# EAGLE board lp-servo12 (EAGLE 6.3)
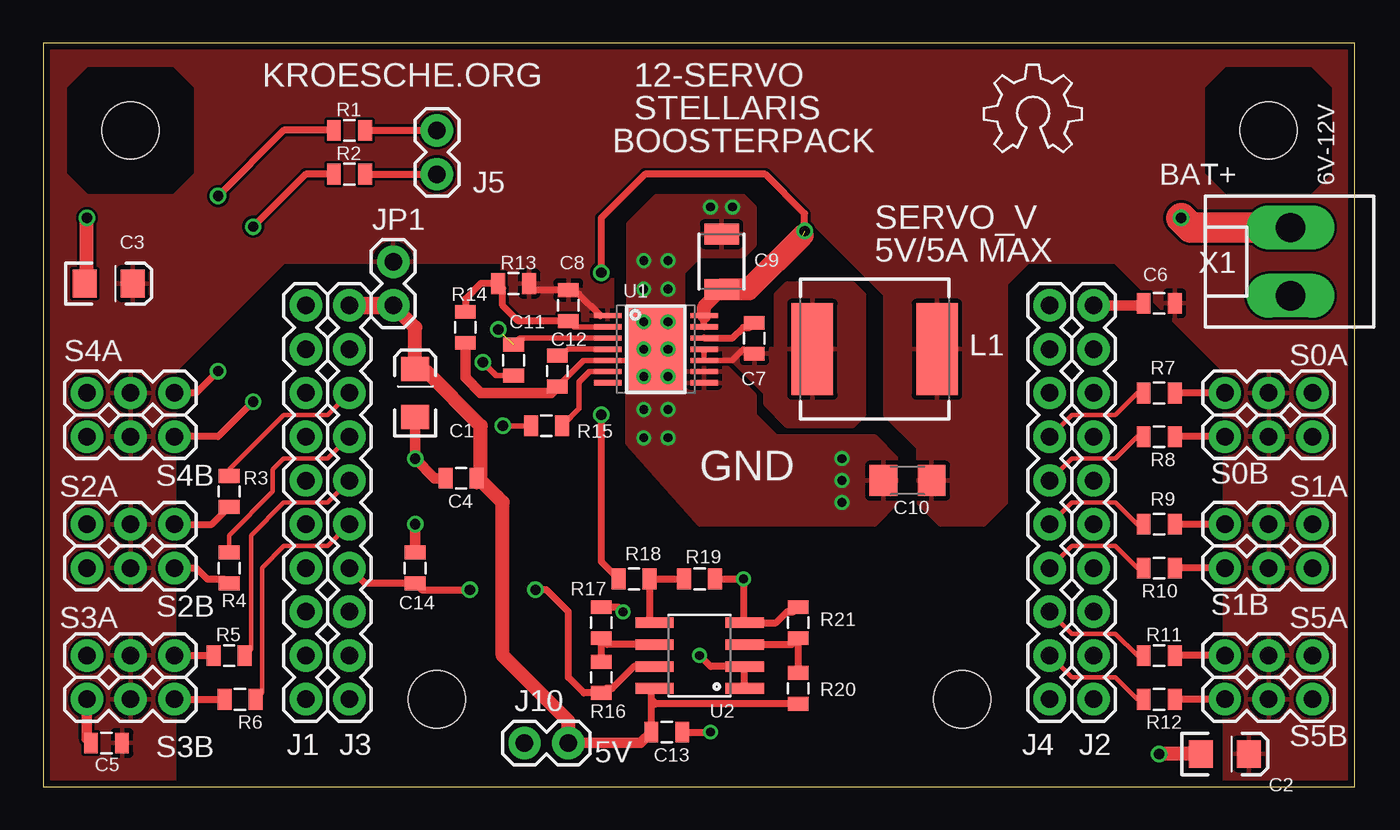
[diagram p0: board, top side]
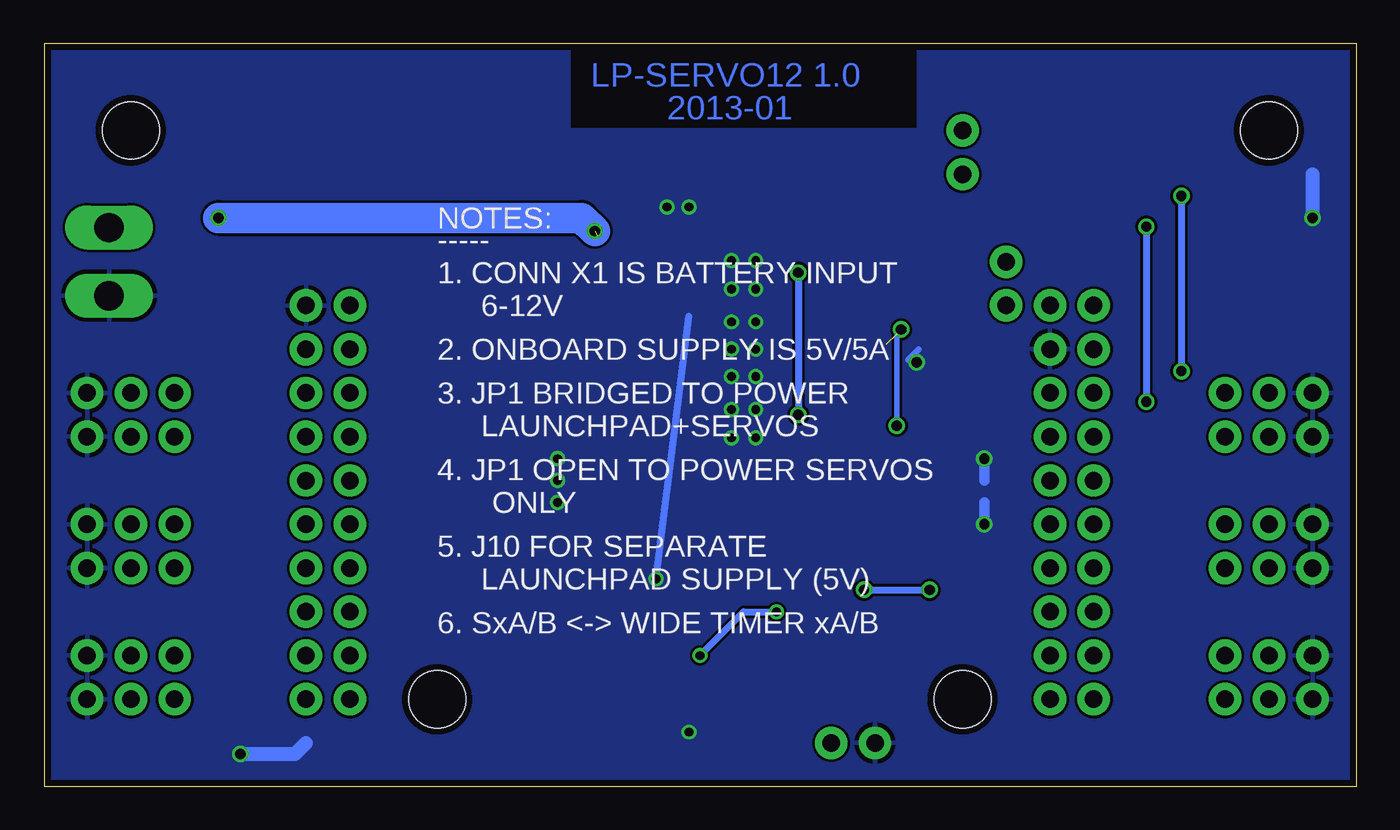
[diagram p1: board, bottom side, seen from below]

Size 76.12 x 43.17 mm. Coordinates in mm from the lower left corner, seen from the top.
Outline: 0,0 76.12,0 76.12,43.17 0,43.17 0,0
Copper layers (1*16): Top 0.0356mm / dielectric 1.5011mm / Bottom 0.0356mm
Design rules "LaenPCBOrder *": minimum track width 6mil, minimum drill 13mil, track to track 6mil, track to pad 6mil, pad to pad 6mil, via to via 6mil, smd to smd 6mil, copper to edge 15mil, drill to drill 6mil, minimum pad ring 7mil, minimum via ring 7mil, stop-mask expansion 4mil, vias tented up to drill 24mil, thermal gap 10mil

## Footprints (pad centres in the part's own frame; a part is rotated, then mirrored left to right if it is on the bottom)
EIA3216 = smd 1.4 x 1.6: A 1.4,0; C -1.4,0
0805 = smd 0.8 x 1.2: 1 -0.9,0; 2 0.9,0
1210 = smd 1.2 x 2: 1 -1.6,0; 2 1.6,0
1206 = smd 1.6 x 1.8: 1 -1.4,0; 2 1.4,0
1X10 = drill 1.016 pad 1.88: 1 0,0; 2 2.54,0; 3 5.08,0; 4 7.62,0; 5 10.16,0; 6 12.7,0; 7 15.24,0; 8 17.78,0; 9 20.32,0; 10 22.86,0
1X02 = drill 1.016 pad 1.88: 1 0,0; 2 2.54,0
VISHAY-IHLP3232DZER = smd 2.413 x 5.334: 1 -3.619,0; 2 3.619,0
1X03 = drill 1.016 pad 1.88: 1 0,0; 2 2.54,0; 3 5.08,0
STAND-OFF = hole 3.302: 0,0
PWP-R-PDSO-G14 = smd 0.3 x 1.6: 1 -1.95,-2.8; 2 -1.3,-2.8; 3 -0.65,-2.8; 4 0,-2.8; 5 0.65,-2.8; 6 1.3,-2.8; 7 1.95,-2.8; 8 1.95,2.8; 9 1.3,2.8; 10 0.65,2.8; 11 0,2.8; 12 -0.65,2.8; 13 -1.3,2.8; 14 -1.95,2.8 | smd 5 x 3.4: 15 0,0
SO08 = smd 0.61 x 2.21: 1 -1.905,-2.616; 2 -0.635,-2.616; 3 0.635,-2.616; 4 1.905,-2.616; 5 1.905,2.616; 6 0.635,2.616; 7 -0.635,2.616; 8 -1.905,2.616
KK-156-2 = drill 1.7 pad 2.184 long: 1 -1.98,0; 2 1.98,0

## Placement (x,y rotation side)
C1  10uF  [EIA3216]  21.59,22.86 90 top
C2  10uF  [EIA3216]  68.58,1.91 0 top
C3  10uF  [EIA3216]  3.81,29.21 0 top
C4  1uF  [0805]  24.26,17.91 180 top
C5  1uF  [0805]  3.68,2.54 180 top
C6  1uF  [0805]  64.77,28.07 180 top
C7  100nF  [0805]  41.27,26.04 270 top
C8  22pF  [0805]  30.48,27.94 270 top
C9  22uF  [1210]  39.37,30.48 90 top
C10  22uF  [1206]  50.16,17.78 180 top
C11  1uF  [0805]  27.3,24.77 270 top
C12  10nF  [0805]  29.84,24.13 270 top
C13  1uF  [0805]  36.2,3.17 0 top
C14  1uF  [0805]  21.59,12.7 90 top
J1  [1X10]  15.24,27.94 270 top
J2  [1X10]  60.96,27.94 270 top
J3  [1X10]  17.78,27.94 270 top
J4  [1X10]  58.42,27.94 270 top
J5  [1X02]  22.86,38.1 270 top
J10  [1X02]  27.94,2.54 0 top
JP1  [1X02]  20.32,30.48 270 top
L1  3.3uH  [VISHAY-IHLP3232DZER]  48.26,25.4 180 top
LOGO2  OSHW_LOGO_6MILX0200-NT  [OSHW_6X200_NOTEXT]  54.61,36.83 0 top
R1  220  [0805]  17.78,38.1 0 top
R2  220  [0805]  17.78,35.56 0 top
R3  220  [0805]  10.79,17.14 90 top
R4  220  [0805]  10.79,12.7 90 top
R5  220  [0805]  10.79,7.62 0 top
R6  220  [0805]  11.43,5.08 0 top
R7  220  [0805]  64.77,22.86 0 top
R8  220  [0805]  64.77,20.32 0 top
R9  220  [0805]  64.77,15.24 0 top
R10  220  [0805]  64.77,12.7 0 top
R11  220  [0805]  64.77,7.62 0 top
R12  220  [0805]  64.77,5.08 0 top
R13  124K  [0805]  27.3,29.21 0 top
R14  22.1K  [0805]  24.51,26.67 90 top
R15  100K  [0805]  29.21,20.95 0 top
R16  30K  [0805]  32.38,6.35 270 top
R17  10K  [0805]  32.38,9.53 270 top
R18  30K  [0805]  34.29,12.06 0 top
R19  10K  [0805]  38.1,12.06 180 top
R20  15K  [0805]  43.81,5.71 270 top
R21  10K  [0805]  43.81,9.53 270 top
S0A  [1X03]  68.58,22.86 0 top
S0B  [1X03]  68.58,20.32 0 top
S1A  [1X03]  68.58,15.24 0 top
S1B  [1X03]  68.58,12.7 0 top
S2A  [1X03]  2.54,15.24 0 top
S2B  [1X03]  2.54,12.7 0 top
S3A  [1X03]  2.54,7.62 0 top
S3B  [1X03]  2.54,5.08 0 top
S4A  [1X03]  2.54,22.86 0 top
S4B  [1X03]  2.54,20.32 0 top
S5A  [1X03]  68.58,7.62 0 top
S5B  [1X03]  68.58,5.08 0 top
STANDOFF1  STAND-OFF  [STAND-OFF]  53.34,5.08 0 top
STANDOFF2  STAND-OFF  [STAND-OFF]  22.86,5.08 0 top
STANDOFF3  STAND-OFF  [STAND-OFF]  5.08,38.1 0 top
STANDOFF4  STAND-OFF  [STAND-OFF]  71.12,38.1 0 top
U1  TPS54526PWP  [PWP-R-PDSO-G14]  35.56,25.4 270 top
U2  LMV358  [SO08]  38.1,7.62 90 top
X1  [KK-156-2]  72.39,30.48 90 top

## Library data of the parts
C1-C3 = SparkFun-Passives; PARTNO: CAP_10u_20V_20PCT_1206; SIZE: (1206); TOL: 20%; TYPE: TANT; VOLT: 20V
C4-C6 C11 C13 C14 = SparkFun-Passives; PARTNO: CAP_1u_20V_20PCT_0805; SIZE: (0805); TOL: 20%; VOLT: 20V
C7 = SparkFun-Passives; PARTNO: CAP_100n_25V_10PCT_0805; SIZE: (0805); TC: X7R; TOL: 10%; VOLT: 25V
C8 = SparkFun-Passives; PARTNO: CAP_22p_50V_10PCT_0805; SIZE: (0805); TC: C0G; TOL: 10%; VOLT: 50V
C9 = SparkFun-Passives; PARTNO: CAP_22u_16V_10PCT_1210; SIZE: (1210); TC: X5R; TOL: 10%; VOLT: 16V
C10 = SparkFun-Passives; PARTNO: CAP_22u_16V_20PCT_1206; SIZE: (1206); TC: X5R; TOL: 20%; VOLT: 16V
C12 = SparkFun-Passives; PARTNO: CAP_10n_50V_10PCT_0805; SIZE: (0805); TC: X7R; TOL: 10%; VOLT: 50V
J1-J4 = SparkFun-Connectors; PARTNO: 68002-110HLF
J5 JP1 = SparkFun-Passives; PARTNO: 68002-202HLF
J10 = SparkFun-Passives; PARTNO: 68016-402
L1 = kroesche; LOAD: 10A; MANF: Vishay/Dale; MANF#: IHLP3232DZER3R3M11; MOUSER#: 70-IHLP3232DZER3R3M11; PARTNO: IHLP3232DZER3R3M11; TOL: 20%
LOGO2 = ohw-logo; BOM: EXCLUDE
R1 = SparkFun-Resistors; MANF: Panasonic; MANF#: ERJ-6GEYJ221V; MOUSER#: 667-ERJ-6GEYJ221V; PARTNO: RES_220_20V_10PCT_0805; SIZE: (0805); TOL: 10%; VOLT: 50V
R2-R12 = SparkFun-Resistors; PARTNO: RES_220_20V_10PCT_0805; SIZE: (0805); TOL: 10%; VOLT: 50V
R13 = SparkFun-Resistors; PARTNO: RES_124K_20V_1PCT_0805; RATE: 1/8W; SIZE: (0805); TOL: 1%; VOLT: 20V
R14 = SparkFun-Resistors; PARTNO: RES_22.1K_20V_1PCT_0805; RATE: 1/8W; SIZE: (0805); TOL: 1%; VOLT: 20V
R15 = SparkFun-Resistors; PARTNO: RES_100K_20V_1PCT_0805; RATE: 1/8W; SIZE: (0805); TOL: 1%; VOLT: 20V
R16 R18 = SparkFun-Resistors; PARTNO: RES_30K_20V_1PCT_0805; SIZE: (0805); TOL: 1%; VOLT: 20V
R17 R19 R21 = SparkFun-Resistors; PARTNO: RES_10K_20V_1PCT_0805; SIZE: (0805); TOL: 1%; VOLT: 20V
R20 = SparkFun-Resistors; PARTNO: RES_15K_20V_1PCT_0805; SIZE: (0805); TOL: 1%; VOLT: 20V
S0A S0B S1A S1B S2A S2B S3A S3B S4A S4B S5A S5B = SparkFun-Passives; PARTNO: 68002-403HLF
STANDOFF1-STANDOFF4 = SparkFun-Electromechanical; BOM: EXCLUDE
U1 = kroesche; MANF: Texas Instruments; MANF#: TPS54526PWP; MOUSER#: 595-TPS54526PWP; PARTNO: TPS54526PWP
U2 = SparkFun-AnalogIC; MANF: Texas Instruments; MANF#: LMV358QDR; MOUSER#: 595-LMV358QDR; PARTNO: LMV358QDR
X1 = con-molex; MANF: Molex; MANF#: 76650-0208; MOUSER#: 538-76650-0208; OC_FARNELL: unknown; OC_NEWARK: unknown; PARTNO: KK-156-2-LOCK-RTANGLE

## Nets
+3V3: J1.1
+5V: C1.A C4.1 C13.1 J3.1 J10.2 JP1.2 R20.2 U2.8
AIN2: C14.1 J3.7 R16.2 U2.7
GND: C1.C C2.C C3.C C4.2 C5.2 C6.2 C9.2 C10.2 C11.2 C12.2 C13.2 C14.2 J2.1 J3.2 J10.1 R14.1 R19.1 R21.1 S0A.3 S0B.3 S1A.3 S1B.3 S2A.1 S2B.1 S3A.1 S3B.1 S4A.1 S4B.1 S5A.3 S5B.3 U1.5 U1.8 U1.9 U1.15 U2.4 X1.1
N$1: R1.1 S4A.3
N$2: C7.1 U1.12
N$3: R2.1 S4B.3
N$4: R3.1 S2A.3
N$5: R4.1 S2B.3
N$6: R5.1 S3A.3
N$7: C7.2 L1.2 U1.10 U1.11
N$8: R16.1 R17.2 U2.6
N$9: R7.2 S0A.1
N$10: R6.1 S3B.3
N$11: R8.2 S0B.1
N$12: R9.2 S1A.1
N$13: R10.2 S1B.1
N$14: R11.2 S5A.1
N$15: R12.2 S5B.1
N$16: C8.2 R13.1 R14.2 U1.2
N$17: R18.2 R19.2 U2.5
N$18: R15.2 U1.6
N$20: C12.1 U1.4
N$21: R17.1 U2.1 U2.2
N$22: C11.1 R15.1 U1.3
N$23: R20.1 R21.2 U2.3
SERVO_V: C2.A C3.A C5.1 C6.1 C8.1 C10.1 JP1.1 L1.1 R13.2 S0A.2 S0B.2 S1A.2 S1B.2 S2A.2 S2B.2 S3A.2 S3B.2 S4A.2 S4B.2 S5A.2 S5B.2 U1.1
VBAT: C9.1 R18.1 U1.13 U1.14 X1.2
WT0A: J4.4 R7.1
WT0B: J4.5 R8.1
WT1A: J4.6 R9.1
WT1B: J4.7 R10.1
WT2A: J3.3 R3.2
WT2B: J3.4 R4.2
WT3A: J3.5 R5.2
WT3B: J3.6 R6.2
WT4A: J5.1 R1.2
WT4B: J5.2 R2.2
WT5A: J4.8 R11.1
WT5B: J4.9 R12.1

## Tracks (layer width: path | path; a pad name or v marks a point on that pad's centre or on a via)
+5V
  Top 0.254: 25.16,17.39 C4.1 26.24,16.83 26.35,16.83
  Top 0.406: C13.1 35.3,5.08 | 35.3,5.08 35.3,5.53 U2.8 | R20.2 35.56,4.82 35.3,5.08 | 22.23,24.13 21.72,24.13 C1.A
  Top 0.61: C4.1 25.4,18.15 | C13.1 34.66,2.54 J10.2
  Top 0.813: C1.A 21.59,26.67 JP1.2 | 22.23,24.13 25.4,20.95 25.4,17.78 26.35,16.83 26.67,16.51 26.67,7.62 30.48,3.81 J10.2
  Top 1.016: JP1.2 J3.1
AIN2  (via drill 0.6)
  Top 0.406: U2.7 34.29,6.99 33.02,5.71 32.65,5.71 R16.2 31.38,5.45 30.48,6.35 30.48,10.16 29.21,11.43 v28.57,11.43 | J3.7 18.68,11.8 C14.1 21.96,11.43 v24.77,11.43
  Bottom 0.406: v28.57,11.43 v24.77,11.43
GND  (via drill 0.51, 0.6)
  Top 0.305: C11.2 26.3,23.86 v25.53,24.64 | C12.2 31.36,24.75 U1.5 34.91,24.75 U1.15
  Top 0.406: R21.1 43.55,10.16 43.18,10.16 42.55,9.53 U2.4 40.64,9.6 v40.64,12.06 R19.1 | C13.2 v38.73,3.17
  Top 0.61: R14.1 24.51,23.75 25.4,22.86 29.48,22.86 C12.2 | C5.2 2.54,2.78 S3B.1 | C1.C v21.59,19.05 22.73,17.91 C4.2 | C14.2 v21.59,15.24 | C6.2 63.74,27.94 J2.1
  Top 0.813: C3.C 2.54,29.21 v2.54,33.02 | C2.C v64.77,1.91
  Bottom 0.305: v25.53,24.64 26.04,24.77 25.4,25.4
  Bottom 0.406: v40.64,12.06 38.73,27.3
  Bottom 0.61: v21.59,19.05 21.59,17.78 | v21.59,15.24 21.59,16.51
  Bottom 0.813: v2.54,33.02 2.54,35.56 | v64.77,1.91 61.59,1.91 60.96,2.54
  other vias: 34.86,30.54 38.73,33.66 40.01,33.66 36.26,30.54 36.26,28.89 34.86,28.89 34.86,26.99 36.26,26.99 34.86,25.4 36.26,25.4 34.86,23.81 36.26,23.81 34.86,21.91 36.26,21.91 34.86,20.26 36.26,20.26 46.35,19.05 46.35,17.78 46.35,16.51
  pour Bottom: 0,43.18 25.4,43.18 25.4,38.1 45.72,38.1 45.72,43.18 76.2,43.18 76.2,0 0,0
  pour Top: 33.97,25.4 33.97,32.7 35.56,34.29 40.64,34.29 41.27,33.66 41.27,31.43 40.64,30.8 38.1,30.8 37.15,29.84 37.15,25.4
  pour Top: 33.97,25.4 37.15,24.13 37.15,25.4
  pour Top: 48.26,20.32 42.55,20.32 41.27,21.59 41.27,22.73 39.62,24.38 33.91,24.38 33.91,19.94 38.1,15.24 48.26,15.24 49.53,16.51 49.53,19.05
N$1  (via drill 0.6)
  Top 0.406: R1.1 13.97,38.1 v10.16,34.29 | v10.16,24.13 8.89,22.86 S4A.3
  Bottom 0.406: v10.16,34.29 v10.16,24.13
N$2
  Top 0.406: U1.12 40.02,26.05 40.64,26.67 41.01,26.67 C7.1
N$3  (via drill 0.6)
  Top 0.406: R2.1 15.24,35.56 v12.19,32.51 | v12.19,22.35 10.16,20.32 S4B.3
  Bottom 0.406: v12.19,32.51 v12.19,22.35
N$4
  Top 0.406: S2A.3 9.79,15.24 R3.1
N$5
  Top 0.406: S2B.3 8.89,12.7 9.53,12.06 10.53,12.06 R4.1
N$6
  Top 0.406: S3A.3 R5.1
N$7
  Top 0.305: 40.64,25.4 39.99,24.75 U1.10 U1.11
  pour Top: 38.73,24.77 40.01,24.77 41.91,22.86 41.91,22.23 43.18,20.95 46.99,20.95 47.62,21.59 47.62,28.57 46.99,29.21 43.18,29.21 42.55,28.57 42.55,25.4 38.73,25.4
  pour Top: 38.73,25.4 38.73,24.77 40.01,24.77 40.01,25.4
N$8
  Top 0.406: R16.1 R17.2 32.76,8.26 U2.6
N$9
  Top 0.406: S0A.1 R7.2
N$10
  Top 0.406: S3B.3 R6.1
N$11
  Top 0.406: S0B.1 R8.2
N$12
  Top 0.406: S1A.1 R9.2
N$13
  Top 0.406: S1B.1 R10.2
N$14
  Top 0.406: S5A.1 R11.2
N$15
  Top 0.406: S5B.1 R12.2
N$16
  Top 0.305: U1.2 30.82,26.7 C8.2
  Top 0.406: R14.2 24.51,28.32 25.4,29.21 R13.1 26.67,28.95 26.67,27.94 27.57,27.04 C8.2
N$17
  Top 0.406: R19.2 R18.2 35.19,9.82 U2.5
N$18
  Top 0.305: U1.6 31.72,24.1 31.11,23.5 31.11,21.96 R15.2
N$20
  Top 0.305: U1.4 30.48,25.4 C12.1
N$21  (via drill 0.51)
  Top 0.406: U2.1 U2.2 38.73,6.99 v38.1,7.62 | v33.66,10.16 33.39,10.43 R17.1
  Bottom 0.406: v38.1,7.62 35.56,10.16 v33.66,10.16
N$22  (via drill 0.6)  (1 unrouted)
  Top 0.305: U1.3 27.69,26.05 C11.1 | R15.1 v26.67,20.95
  Bottom 0.305: v26.67,20.95 26.67,26.29 v26.42,26.54
N$23
  Top 0.406: R20.1 R21.2 43.45,8.26 U2.3
SERVO_V
  Top 0.305: U1.1 32.34,27.35 | 31.11,28.57 30.75,28.57 C8.1
  Top 0.406: 32.34,27.35 31.11,28.57 | C8.1 28.57,28.84 R13.2
  pour Top: 0,25.4 1.27,26.67 6.35,26.67 7.62,25.4 7.62,0 0,0
  pour Top: 52.07,15.24 54.61,15.24 55.88,16.51 55.88,29.21 46.99,38.1 27.94,38.1 26.67,36.83 26.67,27.94 27.94,26.67 33.02,26.67 33.02,33.02 34.92,34.92 42.55,34.92 48.9,28.57 48.9,21.59 50.8,19.68 50.8,16.51
  pour Top: 76.2,26.67 74.93,27.94 69.85,27.94 68.58,26.67 68.58,0 76.2,0
  pour Top: 0,24.13 0,33.02 1.27,34.29 7.62,34.29 8.89,35.56 8.89,41.91 10.16,43.18 27.94,43.18 27.94,30.48 13.97,30.48 7.62,24.13
  pour Top: 8.89,40.64 7.62,41.91 2.54,41.91 1.27,40.64 1.27,35.56 2.54,34.29 1.27,33.02 0,33.02 0,43.18 10.16,43.18 10.16,40.64
  pour Top: 55.88,29.21 57.15,30.48 62.23,30.48 68.58,24.13 76.2,24.13 76.2,34.29 68.58,34.29 67.31,35.56 67.31,43.18 50.8,43.18 50.8,29.21
  pour Top: 73.66,34.29 74.93,35.56 74.93,40.64 73.66,41.91 68.58,41.91 67.31,40.64 67.31,43.18 76.2,43.18 76.2,34.29
  pour Top: 50.8,33.02 45.72,38.1 27.94,38.1 27.94,43.18 50.8,43.18
VBAT  (via drill 0.6)  (1 unrouted)
  Top 0.406: U1.13 U1.14 | v32.38,29.84 32.38,33.02 34.92,35.56 41.91,35.56 44.2,33.27 v44.2,32.26 | v32.38,21.59 32.38,13.07 R18.1
  Top 0.813: C9.1 38.36,27.87 U1.14
  Top 1.27: C9.1 40.95,28.88 44.07,32
  Top 1.778: X1.2 66.6,32.46 v66.04,33.02
  Bottom 0.406: v32.38,29.84 v32.38,21.59
  Bottom 1.778: v66.04,33.02 44.96,33.02 v44.2,32.26
WT0A
  Top 0.254: J4.4 59.69,21.59 62.23,21.59 63.5,22.86 R7.1
WT0B
  Top 0.254: J4.5 59.69,19.05 62.23,19.05 63.5,20.32 R8.1
WT1A
  Top 0.254: J4.6 59.69,16.51 62.23,16.51 63.5,15.24 R9.1
WT1B
  Top 0.254: J4.7 59.69,13.97 62.23,13.97 63.5,12.7 R10.1
WT2A
  Top 0.254: J3.3 16.51,21.59 13.97,21.59 10.79,18.41 R3.2
WT2B
  Top 0.254: J3.4 16.51,19.05 13.97,19.05 13.34,18.41 13.34,17.14 10.79,14.61 R4.2
WT3A
  Top 0.254: J3.5 16.51,16.51 13.97,16.51 12.06,14.61 12.06,7.99 R5.2
WT3B
  Top 0.254: J3.6 16.51,13.97 13.97,13.97 12.7,12.7 12.7,5.45 R6.2
WT4A
  Top 0.406: R1.2 J5.1
WT4B
  Top 0.406: R2.2 J5.2
WT5A
  Top 0.254: J4.8 59.69,8.89 62.23,8.89 63.5,7.62 R11.1
WT5B
  Top 0.254: J4.9 59.69,6.35 62.23,6.35 63.5,5.08 R12.1

## Text on the board
Bottom: LP-SERVO12 1.0 | 2013-01
tPlace: KROESCHE.ORG | 12-SERVO | STELLARIS | BOOSTERPACK | BAT+ | 6V-12V | SERVO_V | 5V/5A MAX | GND | 5V | /Users/joe/Desktop/soldercat.bmp
bPlace: NOTES: | ----- | 1. CONN X1 IS BATTERY INPUT | 6-12V | 2. ONBOARD SUPPLY IS 5V/5A | 3. JP1 BRIDGED TO POWER | LAUNCHPAD+SERVOS | 4. JP1 OPEN TO POWER SERVOS | ONLY | 5. J10 FOR SEPARATE | LAUNCHPAD SUPPLY (5V) | 6. SxA/B <-> WIDE TIMER xA/B
tDocu: Copyright (c) 2013 by Joe Kroesche (kroesche.org) / All rights reserved. | This work is licensed under the / Creative Commons Attribution 3.0 Unported License. / To view a copy of this license, visit / http://creativecommons.org/licenses/by/3.0/.
200bmp: /Users/joe/Desktop/soldercat.bmp | /Users/joe/Desktop/soldercat.bmp | /Users/joe/Desktop/soldercat.bmp